# Altium PCB 超声波模块云台PCB.PcbDoc
Units mil, origin at the board's own origin, x right, y up, seen from the top; angles counter-clockwise.
Board outline 1079.29 x 629.92 mil, 2 copper layers (Top Layer, Bottom Layer); 2 components, 4 nets, 12 pads, 2 vias.
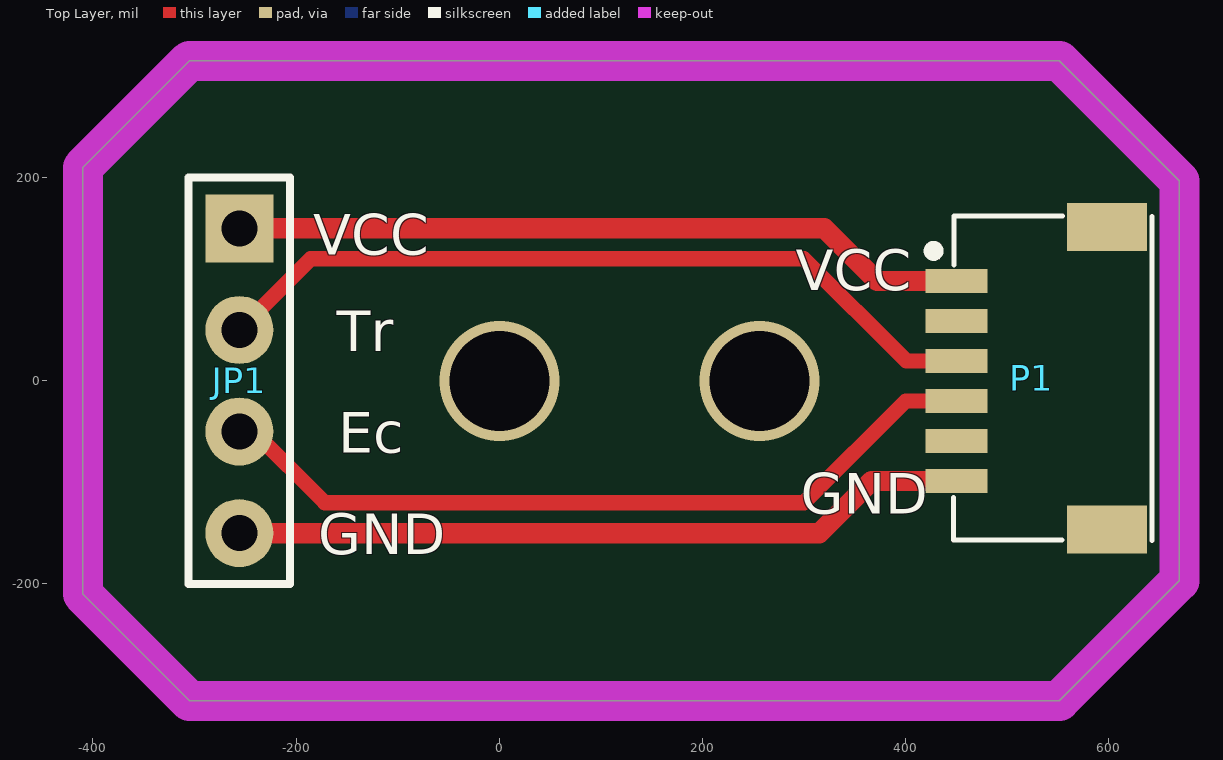
[diagram p0: Top Layer view]
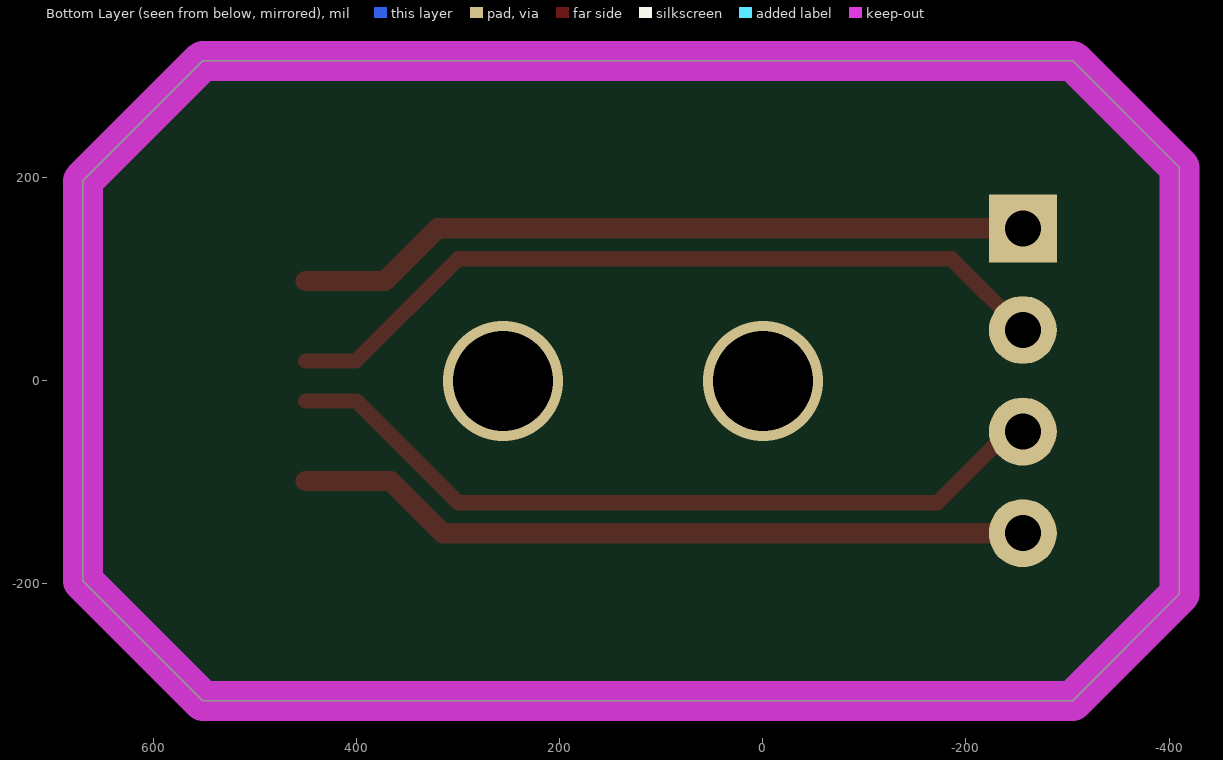
[diagram p1: Bottom Layer view, seen from below]

## Layer stack, top to bottom
Top Solder: solder mask 0.4, Solder Resist, Dk 3.5
Top Layer: signal copper 1.4
Dielectric 1: dielectric 12.6, FR-4, Dk 4.8
Bottom Layer: signal copper 1.4
Bottom Solder: solder mask 0.4, Solder Resist, Dk 3.5

## Board outline
-410,-210 -410,210 -305.04,314.96 551.18,314.96 669.29,196.85 669.29,-196.85 551.18,-314.96 -305.04,-314.96

## Design rules (kind name [scope] priority, off if disabled: settings)
Clearance [All] p1: gap=10 ignorepadtopadclearanceinfootprint=TRUE except(0: Arc-Hole Track-Hole SMDPad-Hole THPad-Hole Via-Hole Fill-Hole Poly-Hole Region-Hole Text-Hole)
PolygonConnect [All] p1: connectstyle=Relief reliefconductorwidth=10 reliefentries=4 polygonreliefangle="90 Angle" airgapwidth=10
RoutingVias [All] p1: holewidth=28 width=50 viastyle="Through Hole" minholewidth=28 minwidth=50 maxholewidth=28 maxwidth=50
SolderMaskExpansion [All] p1: expansion=4 istentingtop=FALSE
Width [All] p1: maxlimit=100 minlimit=10 preferedwidth=10
30 further rules are at their usual default settings.

## Components (designator, comment, footprint, x,y, rotation, side; value= is the part's Value field where it differs from the comment)
JP1 "HDR-1X4" HDR2.54-LI-4P -255.91,0 r270 top
P1 "HEAD6" SH1.0-6P 450,98.11 r270 top

## Footprints (in the part's own frame and the unit in brackets; to place one, negate y for a bottom-side part, rotate by r counter-clockwise, add the part's x,y. Pads: shape width x height; smd on the part's side, far side on the other; paste and mask are expansions set on the pad)
HDR2.54-LI-4P [mm] "排针，4脚"
  rect 1.7x1.7 hole 0.9: 1(-3.81,0)
  round 1.7 hole 0.9: 2(-1.27,0) 3(1.27,0) 4(3.81,0)
  silkscreen extent -5.08,-1.27 5.08,1.27, body extent -5.08,-1.27 5.08,1.27, height 8.5
SH1.0-6P [mm]
  rect 0.6x1.55 smd: 1(0,0) 2(1,0) 3(2,0) 4(3,0) 5(4,0) 6(5,0)
  rect 1.2x2 smd: A(-1.346,3.759) B(6.21,3.759)
  silkscreen extent -1.63,-0.7 6.48,4.89

## Part data
JP1: library part "Header 4", "4P接插件", BOM名称=4P接插件, 版权归属="封装库来自淘宝 ID：黄晶宝石", 学习资源=https://shop463601444.taobao.com

## Via types
v1: diameter 118.11, hole 98.43, Top Layer to Bottom Layer, 2 vias

## Nets (pads, with @x,y where several pads share a name; then routed paths per layer and width w, separated by ;. In a path a pad name is that pad's centre, name@x,y a point inside that pad or via, vN(x,y) a via of type N, cw(c..) or ccw(c..) an arc to the next point about the centre after c; other vN are vias at no path point)
Echo: JP1.3 P1.4 | length 776.3
  Top Layer w15: JP1.3 -241.85,-50 -171.85,-120 300,-120 400,-20 P1.4
GND: JP1.4 P1.6 | length 727.1
  Top Layer w20: JP1.4 315,-150 366.26,-98.74 P1.6
Trig: JP1.2 P1.3 | length 776.6
  Top Layer w15: JP1.2 -185.91,120 300,120 400.63,19.37 P1.3
VCC: JP1.1 P1.1 | length 727.4
  Top Layer w20: JP1.1 320,150 371.89,98.11 P1.1
pads on no net: P1.2 P1.5 P1.A P1.B
copper on no net:
  other v1: 0,0 255.91,0

## Keep-outs
Keep-Out Layer:
  lines w39.37: 669.29,196.85 551.18,314.96 -305.04,314.96 -410,210 -410,-210 -305.04,-314.96 551.18,-314.96 669.29,-196.85 669.29,196.85 ; 669.29,196.85 669.29,196.85

## Silkscreen, mask and mechanical layers (free items; w line width, h text height)
Top Overlay:
  text "VCC" at -183.32,124.01 h40
  text "VCC" at 291.68,89.01 h40
  text "Tr" at -159.99,29.01 h40
  text "Ec" at -158.32,-70.99 h40
  text "GND" at 296.68,-130.99 h40
  text "GND" at -178.32,-170.99 h40